# EAGLE board memoryboard3 (EAGLE 7.3.0)
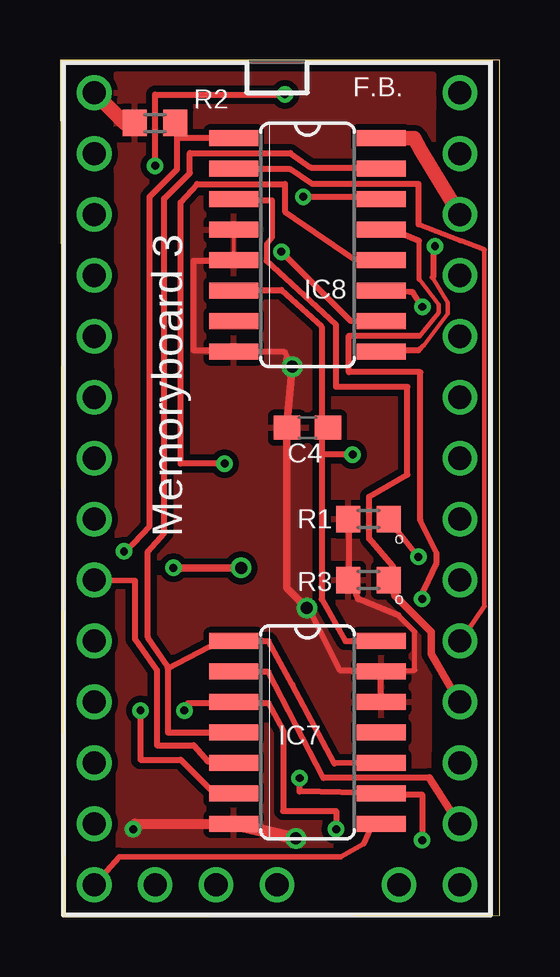
[diagram p0: board, top side]
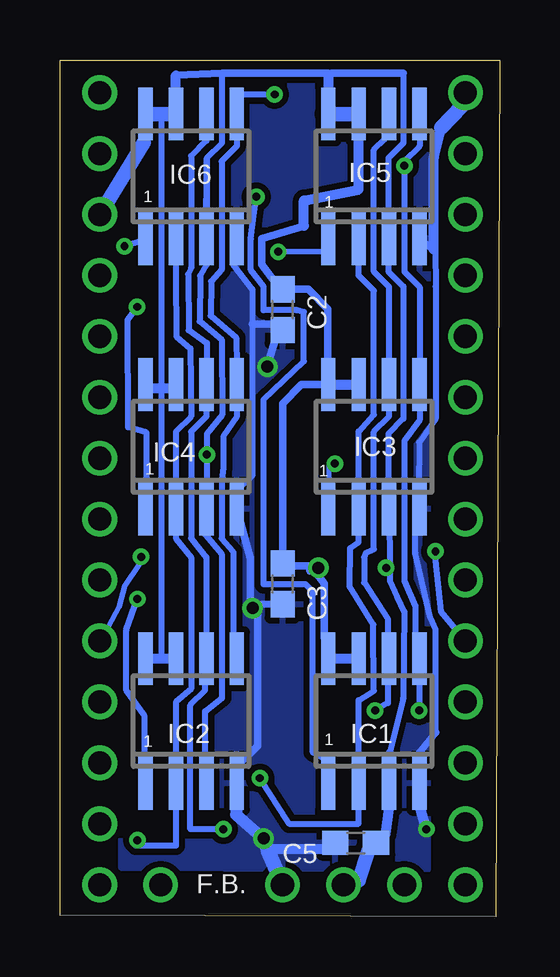
[diagram p1: board, bottom side, seen from below]

Size 18.31 x 35.73 mm. Coordinates in mm from the lower left corner, seen from the top.
Outline: 0.15,0 18.31,0.08 18.31,35.73 0,35.73 0.15,0
Copper layers (1*16): Top 0.0356mm / dielectric 1.5011mm / Bottom 0.0356mm
Design rules "LaenPCBOrder *": minimum track width 6mil, minimum drill 13mil, track to track 6mil, track to pad 6mil, pad to pad 6mil, via to via 6mil, smd to smd 6mil, copper to edge 15mil, drill to drill 6mil, minimum pad ring 7mil, minimum via ring 7mil, stop-mask expansion 3mil, vias tented up to drill 20mil, thermal gap 10mil

## Footprints (pad centres in the part's own frame; a part is rotated, then mirrored left to right if it is on the bottom)
C0603 = smd 1.1 x 1: 1 -0.85,0; 2 0.85,0
SO-08 = smd 0.6 x 2.2: 1 -1.905,-2.6; 2 -0.635,-2.6; 3 0.635,-2.6; 4 1.905,-2.6; 5 1.905,2.6; 6 0.635,2.6; 7 -0.635,2.6; 8 -1.905,2.6
SO14 = smd 0.66 x 2.032: 1 -3.81,-3.073; 2 -2.54,-3.073; 3 -1.27,-3.073; 4 0,-3.073; 5 1.27,-3.073; 6 2.54,-3.073; 7 3.81,-3.073; 8 3.81,3.073; 9 2.54,3.073; 10 1.27,3.073; 11 0,3.073; 12 -1.27,3.073; 13 -2.54,3.073; 14 -3.81,3.073
SO16 = smd 0.66 x 2.032: 1 -4.445,-3.073; 2 -3.175,-3.073; 3 -1.905,-3.073; 4 -0.635,-3.073; 5 0.635,-3.073; 6 1.905,-3.073; 7 3.175,-3.073; 8 4.445,-3.073; 9 4.445,3.073; 10 3.175,3.073; 11 1.905,3.073; 12 0.635,3.073; 13 -0.635,3.073; 14 -1.905,3.073; 15 -3.175,3.073; 16 -4.445,3.073
R0603 = smd 1 x 1.1: 1 -0.85,0; 2 0.85,0
TEENSY_3.0_BASIC-PGM = drill 0.965: 0 -7.62,13.97; 1 -7.62,11.43; 2 -7.62,8.89; 3 -7.62,6.35; 3.3V 7.62,11.43; 3.3V1 -2.54,-16.51; 4 -7.62,3.81; 5 -7.62,1.27; 6 -7.62,-1.27; 7 -7.62,-3.81; 8 -7.62,-6.35; 9 -7.62,-8.89; 10 -7.62,-11.43; 11 -7.62,-13.97; 12 -7.62,-16.51; 13 7.62,-16.51; 14/A0 7.62,-13.97; 15/A1 7.62,-11.43; 16/A2 7.62,-8.89; 17/A3 7.62,-6.35; 18/A4 7.62,-3.81; 19/A5 7.62,-1.27; 20/A6 7.62,1.27; 21/A7 7.62,3.81; 22/A8 7.62,6.35; 23/A9 7.62,8.89; AGND 7.62,13.97; GND -7.62,16.51; GND1 0,-16.51; RESET 5.08,-16.51; VBAT -5.08,-16.51; VIN 7.62,16.51

## Placement (x,y rotation side)
C2  10nF  [C0603]  9.04,25.32 270 bottom
C3  10nF  [C0603]  9.04,13.89 270 bottom
C4  10nF  [C0603]  10.31,20.4 180 top
C5  10nF  [C0603]  5.99,3.09 180 bottom
IC1  SPI Memory  [SO-08]  5.23,8.17 0 bottom
IC2  SPI Memory  [SO-08]  12.85,8.17 0 bottom
IC3  SPI Memory  [SO-08]  5.23,19.6 0 bottom
IC4  SPI Memory  [SO-08]  12.85,19.6 0 bottom
IC5  SPI Memory  [SO-08]  5.23,30.87 0 bottom
IC6  SPI Memory  [SO-08]  12.85,30.87 0 bottom
IC7  74LCX126  [SO14]  10.31,7.7 270 top
IC8  74LCX138  [SO16]  10.31,28.02 270 top
R1  10k  [R0603]  12.85,16.59 180 top
R2  10k  [R0603]  3.96,33.1 180 top
R3  10k  [R0603]  12.85,14.05 180 top
T3.1  TEENSY_3.0_BASIC-PGM  [TEENSY_3.0_BASIC-PGM]  9.04,17.86 0 top

## Library data of the parts
C2-C5 R1-R3 = resistor
IC1-IC6 = microchip; MF: MICROCHIP; MPN: 25C080/SN; OC_FARNELL: unknown; OC_NEWARK: 96K4086
IC7 IC8 = 74xx-eu
T3.1 = Teensy3.0

## Nets
AGND: T3.1.AGND
CS0: IC8.1 R2.1 T3.1.8
GND: C2.2 C3.2 C4.2 C5.2 IC1.4 IC2.4 IC3.4 IC4.4 IC5.4 IC6.4 IC7.7 IC7.12 IC7.13 IC8.4 IC8.5 IC8.8 R1.2 R2.2 R3.2 T3.1.GND T3.1.GND1
N$6: IC8.3 R3.1 T3.1.16/A2
N$9: IC5.1 IC8.10
N$11: IC8.2 R1.1 T3.1.17/A3
N$12: IC6.1 IC8.9
N$13: IC3.1 IC8.12
N$15: IC4.1 IC8.11
N$29: IC1.1 IC8.14
N$30: IC2.1 IC8.13
SCK: IC1.6 IC2.6 IC3.6 IC4.6 IC5.6 IC6.6 IC7.3
SCK_T: IC7.2 T3.1.14/A0
SI: IC1.5 IC2.5 IC3.5 IC4.5 IC5.5 IC6.5 IC7.6
SI_T: IC7.5 T3.1.7
SO: IC1.2 IC2.2 IC3.2 IC4.2 IC5.2 IC6.2 IC7.9
SO_T: IC7.8 T3.1.12
SPI_ENABLE: IC7.1 IC7.4 IC7.10 IC8.15
VBAT: T3.1.VBAT
VCC: C2.1 C3.1 C4.1 C5.1 IC1.3 IC1.7 IC1.8 IC2.3 IC2.7 IC2.8 IC3.3 IC3.7 IC3.8 IC4.3 IC4.7 IC4.8 IC5.3 IC5.7 IC5.8 IC6.3 IC6.7 IC6.8 IC7.14 IC8.6 IC8.16 T3.1.3.3V T3.1.3.3V1
VIN: T3.1.VIN

## Tracks (layer width: path | path; a pad name or v marks a point on that pad's centre or on a via)
CS0  (via drill 0.33 pad 0.25)
  Top 0.152: 4.88,33.07 R2.1 4.88,32.99 | 1.37,11.51 T3.1.8
  Top 0.203: 4.95,32.46 4.88,33.07 | 2.74,15.24 v2.67,15.24
  Top 0.254: IC8.1 4.95,32.46 | 4.88,32.99 4.88,31.17 3.73,30.02 3.73,16.31 2.74,15.24
  Bottom 0.203: 2.67,15.01 v2.67,15.24
  Bottom 0.254: T3.1.8 2.44,12.73 2.67,14.86 2.67,15.01
GND  (via drill 0.33 pad 0.25, 0.5)
  Top 0.152: 12.04,14.1 R3.2 12.12,14.1 12.27,14.1 12.34,13.64 12.27,13.72 | 12.04,16.54 R1.2 | 13.87,10.29 13.41,10.29 IC7.13 13.34,10.29 | IC8.4 IC8.5 7.24,27.36 6.78,27.36 | 9.45,20.42 C4.2 9.45,20.5 | 6.78,23.62 7.24,23.62 IC8.8
  Top 0.203: 14.1,12.57 14.78,11.89 14.78,10.29 13.87,10.29
  Top 0.254: 12.04,16.54 12.04,14.1 | 14.1,12.57 12.42,13.26 12.27,13.72 | 9.45,20.5 9.45,20.42 | v9.68,22.94 9.37,23.55 IC8.8 | 6.78,27.36 5.56,27.36 5.56,23.62 6.78,23.62 | 13.34,10.29 11.66,10.29 10.4,12.76 v10.29,12.88 | 13.34,10.21 IC7.13 13.34,8.99 IC7.12
  Top 0.305: 9.45,23.24 v9.68,22.94 9.45,20.5 | v10.29,12.88 9.45,13.72 9.45,20.42 | v3.05,3.66 3.12,3.89
  Top 0.406: 2.69,33.1 R2.2 | 3.12,3.89 IC7.7
  Top 0.508: IC7.7 v9.83,3.28
  Top 0.61: T3.1.GND 2.69,33.1
  Bottom 0.152: 3.51,16.18 3.28,16.08 3.28,16.38 3.12,16.54 IC3.4 | 10.77,6.44 10.82,6.4 10.82,5.64 IC2.4 | IC4.4 10.9,17.07 10.9,17.83 10.82,17.91 10.77,17.94
  Bottom 0.203: 3.3,16.59 IC3.4 3.37,17.86 | 3.51,16.18 3.37,16.05 | 10.38,13.06 10.07,12.95 | IC6.4 11.08,27.16 | C2.2 9.2,24.71
  Bottom 0.254: 3.37,17.86 3.35,19.79 2.67,20.78 2.67,26.28 2.67,27.76 IC5.4 3.28,28.17 | 2.67,7.7 2.67,11.96 2.9,12.5 3.51,15.18 3.51,16.18 | 11.08,27.16 10.3,26.16 10.3,24.71 10.3,18.41 10.77,17.94 | v10.29,12.88 10.07,12.95 | IC1.4 3.28,5.56 3.28,4.5 | C2.2 9.37,24 | 9.79,3.19 v9.83,3.28
  Bottom 0.305: 3.28,28.17 2.74,27.84 | 1.58,33.8 T3.1.GND | IC1.4 3.35,6.84 2.67,7.7 | 9.75,3.2 9.79,3.19 | IC4.4 10.38,14.97 10.38,13.06 C3.2 | 10.07,12.95 10.07,7.14 10.77,6.44 | 9.2,24.71 10.3,24.71 | C5.2 6.63,2.82 | 9.37,24 v9.68,22.94
  Bottom 0.406: 2.74,27.84 2.74,31.66 2.43,32.9 | v3.05,3.66 3.28,4.5 | 6.63,2.82 9.68,2.82 T3.1.GND1
  Bottom 0.508: IC2.4 10.97,4.27 9.75,3.2
  Bottom 0.61: 2.43,32.9 1.58,33.8 | 9.79,3.19 9.67,2.78 T3.1.GND1
  pour Bottom (isolate 0.254): 2.97,34.98 15.54,34.98 15.77,2.06 2.97,1.98
  pour Top (isolate 0.254): 2.36,35.13 15.54,35.13 15.32,2.44 2.44,2.44
N$6
  Top 0.152: 13.72,14.02 R3.1 13.87,14.1 | 16.61,8.99 T3.1.16/A2 | 7.24,29.87 IC8.3
  Top 0.203: 8.61,27.36 8.61,28.04
  Top 0.229: 8.61,28.04 8.84,28.35
  Top 0.254: 13.94,13.41 13.72,14.02 | 8.61,27.36 11.51,24.69 11.51,22.1 14.48,22.1 14.48,18.44 12.88,17.53 12.88,15.77 13.87,14.63 13.87,14.1 | 8.84,28.35 8.84,29.87 7.24,29.87
  Top 0.305: 13.94,13.41 15.47,11.89 15.47,10.97 16.61,8.99
N$9  (via drill 0.33 pad 0.25)
  Top 0.229: v9.22,27.74 12.12,24.84 IC8.10
  Bottom 0.203: 7.16,27.58 7.16,27.74 7.16,28.27 IC5.1
  Bottom 0.229: 7.16,27.74 v9.22,27.74
N$11  (via drill 0.33)
  Top 0.152: 13.72,16.54 R1.1 | 7.24,31.17 IC8.2 | 16.69,11.51 T3.1.17/A3
  Top 0.178: 17.68,12.95 17.68,27.81
  Top 0.203: 14.94,28.88 16.69,28.19 17.68,27.81 | 16.69,11.51 17.68,12.95
  Top 0.229: v14.94,15.01 13.72,16.54
  Top 0.254: 7.24,31.17 9.6,31.17 10.52,30.56 14.94,30.56 14.94,28.88
  Bottom 0.152: 16.61,11.51 T3.1.17/A3
  Bottom 0.203: 15.01,14.71 v14.94,15.01
  Bottom 0.229: 16.61,11.51 15.85,12.95 15.62,13.79 15.01,14.71
N$12  (via drill 0.33)
  Top 0.152: 15.16,23.82 15.14,23.82 | 13.41,23.62 IC8.9
  Top 0.178: v15.63,27.97 15.55,27.97 | 15.5,26.67 16.15,25.6 16.15,25.15 15.16,23.82 | 15.14,23.82 15.02,23.69
  Top 0.203: 15.02,23.69 14.94,23.62 | 15.54,26.67 15.5,26.67
  Top 0.254: 14.94,23.62 13.41,23.62 | 15.55,27.97 15.54,26.67
  Bottom 0.152: 14.86,28.19 14.78,28.27 IC6.1
  Bottom 0.254: 14.86,28.19 v15.63,27.97
N$13  (via drill 0.33)
  Top 0.152: 13.34,27.43 IC8.12
  Top 0.254: 13.34,27.43 12.27,27.43 9.37,29.41 9.37,30.56 5.72,30.56 5.03,29.79 5.03,18.9 v6.86,18.9
  Bottom 0.152: 7.09,17.07 IC3.1
  Bottom 0.203: v6.86,18.9 7.09,18.9 7.09,17.07
N$15  (via drill 0.33)
  Top 0.152: 12.88,26.06 13.34,26.06 IC8.11
  Top 0.254: v15.1,25.44 14.71,26.05 14.55,26.06 IC8.11
  Bottom 0.152: 14.71,17.07 IC4.1
  Bottom 0.254: v15.1,25.44 15.5,24.9 15.47,20.42 14.71,20.19 14.71,17.07
N$29  (via drill 0.33)
  Top 0.152: 14.17,30.02 IC8.14
  Top 0.254: v10.13,30.02 14.17,30.02
  Bottom 0.152: 7.24,6.55 IC1.1
  Bottom 0.254: v10.13,30.02 10.36,28.27 10.36,26.98 9.83,26.29 9.83,25.3 8.46,25.3 8.15,25.22 8.15,23.17 9.83,21.56 9.83,13.87 8.08,13.87 7.77,13.56 7.77,6.86 7.24,6.55
N$30  (via drill 0.33)
  Top 0.152: 13.79,28.65 IC8.13
  Top 0.178: 14.94,24.23 14.98,24.2 15.77,25.19 15.77,25.53 14.96,26.59
  Top 0.203: 14.27,24.24 14.94,24.23 | 14.96,26.59 14.96,28.18
  Top 0.254: 14.96,28.18 13.79,28.65 | 14.94,24.23 12.04,24.23 12.04,22.71 15.01,22.71 15.01,16.54 15.7,15.16 15.7,14.78 15.16,13.64 v15.09,13.26
  Bottom 0.152: 14.78,5.64 IC2.1
  Bottom 0.254: v15.09,13.26 15.54,11.96 15.54,9.45 14.78,8.38 14.78,5.64
SCK  (via drill 0.33)
  Top 0.152: 8.23,8.92 7.24,8.92 IC7.3
  Top 0.254: 7.24,8.92 5.33,8.92 v5.18,8.61 | v11.51,3.66 11.51,4.42 9.3,4.42 9.3,7.77 8.69,8.92 8.23,8.92
  Bottom 0.152: 12.22,22.94 12.27,22.86 12.27,22.25 IC4.6 | 4.65,10.74 IC1.6 | 4.6,21.03 4.65,21.11 4.65,22.17 IC3.6 | 12.27,10.74 IC2.6
  Bottom 0.203: IC6.6 12.22,32.36 | IC1.6 4.65,10.77 4.65,11.81 | 4.79,32.43 IC5.6
  Bottom 0.254: 12.22,32.36 12.85,31.72 12.85,27.05 12.98,26.8 12.95,24.46 12.19,23.93 12.19,23.17 12.22,22.94 | IC4.6 12.22,20.87 12.85,20.23 12.85,15.79 12.22,14.99 IC2.6 | IC3.6 4.6,26.26 5.23,26.9 5.23,31.98 4.79,32.43 | 4.6,21.03 4.6,20.86 5.23,20.23 5.23,15.33 5.59,15.15 5.64,14.99 5.64,13.94 4.65,12.42 4.65,11.81 | v5.18,8.61 4.65,8.92 4.65,10.74 | 12.27,10.74 12.27,9.45 12.88,8.84 12.88,3.66 v11.51,3.66
SCK_T
  Top 0.152: 8.23,10.21 7.24,10.21 IC7.2 | 16.61,3.89 T3.1.14/A0
  Top 0.254: 8.23,10.21 8.69,10.21 10.97,5.79 15.39,5.79
  Top 0.305: 16.61,3.89 15.39,5.79
SI  (via drill 0.33)
  Top 0.152: 7.24,5.18 IC7.6
  Top 0.254: 7.24,5.18 6.25,5.33 5.03,6.55 3.35,6.55 v3.35,8.61 | v9.37,34.29 3.96,34.29 v3.96,31.32
  Bottom 0.152: IC2.5 10.97,10.82 10.97,11.51 11.05,11.58 11.1,11.66 | IC4.5 10.97,22.25 10.97,22.86 10.95,22.94 | 3.33,22.94 3.35,22.86 3.35,22.25 IC3.5 | 3.35,10.74 IC1.5 3.35,10.82 3.35,11.43 3.4,11.05 | 10.97,34.29 IC6.5
  Bottom 0.203: 3.96,31.51 v3.96,31.32
  Bottom 0.254: IC6.5 10.95,32.14 11.58,31.51 11.58,26.98 12.01,26.5 12.04,25.07 10.97,24.16 10.95,22.94 | IC4.5 10.95,20.87 11.51,20.04 11.51,18.75 11.58,18.21 11.58,15.79 11.1,15.23 11.1,11.66 | IC5.5 3.33,32.14 3.96,31.51 | v3.96,31.32 3.96,26.9 3.33,26.27 3.33,22.94 | IC3.5 3.33,20.72 3.96,19.85 3.96,14 3.51,12.95 3.51,11.74 | 3.51,11.13 3.51,11.74 | 3.51,11.74 3.4,11.05 | 3.35,10.74 v3.35,8.61 | v9.37,34.29 10.97,34.29
SI_T
  Top 0.152: 6.17,6.48 7.24,6.48 IC7.5
  Top 0.254: 6.17,6.48 5.56,7.16 4.04,7.16 4.04,10.29 3.12,11.58 3.12,14.02 T3.1.7
SO  (via drill 0.33)
  Top 0.152: 13.87,5.11 13.41,5.11 IC7.9
  Top 0.254: IC7.9 9.98,5.23 v9.98,5.79 | 13.87,5.11 15.09,5.11 v15.09,3.2
  Bottom 0.152: 5.87,27.38 IC5.2 | 5.87,15.95 IC3.2 | 13.49,6.11 IC2.2 | 13.49,17.86 IC4.2 | 5.87,5.11 IC1.2
  Bottom 0.254: IC6.2 13.49,26.74 13.46,24.2 12.88,23.7 12.85,20.87 13.49,20.23 13.49,17.86 | IC4.2 13.49,15.78 12.85,14.99 12.85,9.51 13.49,8.96 13.49,6.11 | IC3.2 5.87,20.24 5.23,20.95 5.23,26.1 5.87,26.74 5.87,27.38 | IC1.2 5.87,9.04 5.23,9.44 5.26,12.19 6.25,13.77 6.22,15.37 5.87,15.63 5.87,15.95 | 5.87,5.11 5.87,3.89 8.76,3.89 v9.98,5.79 | IC2.2 13.49,2.97 15.16,2.97 v15.09,3.2
SO_T
  Top 0.229: 2.47,2.5 8.15,2.51 10.59,2.51 11.69,2.5 12.65,3.05 13.03,3.89 IC7.8
  Top 0.254: T3.1.12 2.47,2.5
SPI_ENABLE
  Top 0.152: 13.41,6.48 IC7.10 | 13.34,31.24 IC8.15
  Top 0.203: 6.25,11.28 IC7.1
  Top 0.254: IC7.4 4.5,7.7 4.5,10.36 | IC7.1 8.69,11.51 9.68,9.68 11.43,6.4 IC7.10 | 13.34,31.24 10.45,31.24 9.6,31.85 5.41,31.85 5.41,31.01 4.34,29.95 4.34,16 3.66,15.24 3.66,11.66 4.5,10.44 4.5,10.36 | 4.5,10.36 6.25,11.28
VCC  (via drill 0.33, 0.5)
  Top 0.152: 10.9,20.5 C4.1 | 7.09,26.14 IC8.6
  Top 0.254: 10.9,20.5 10.9,24.61 9.22,26.14 7.09,26.14 | IC7.14 11.89,11.51 10.9,13.26 10.9,19.28 | 10.9,20.27 10.9,19.28 | v12.19,19.28 10.9,19.28
  Top 0.305: 10.9,20.27 C4.1 | v4.72,14.55 v7.54,14.55
  Top 0.61: IC8.16 14.76,32.46 15.06,31.93 T3.1.3.3V
  Bottom 0.152: 14.1,21.95 13.51,22.04 | IC1.8 7.16,10.97 7.16,11.58 7.31,11.64 | C5.1 5.03,3.05 5.11,3.12 5.13,3.09 | 4.6,4.52 4.65,4.65 4.65,5.56 IC1.3 4.57,5.64 4.57,6.25 4.48,6.28 | IC3.3 4.65,17.07 4.65,17.75 4.63,17.78 | 7.14,35.13 7.16,35.13 7.01,35.18 | 14.76,32.78 14.78,32.92 14.78,33.3 IC6.8 | 14.08,21.96 14.78,22.1 IC4.8 | 16.61,29.11 T3.1.3.3V | IC4.3 12.27,17.07 12.19,16.84
  Bottom 0.203: IC5.3 4.63,27.86 | 12.35,16.05 IC4.3
  Bottom 0.254: 4.57,6.86 4.02,9.11 4,9.28 3.96,12.73 4.27,13.35 4.57,14.03 4.57,14.4 IC3.3 | 4.57,6.28 4.48,6.28 | 4,35.18 4,32.27 4.63,31.64 4.63,27.86 4.63,26.91 4,26.28 4,20.77 4.63,20.14 4.63,17.78 | IC2.3 12.27,6.71 12.27,8.58 11.56,9.12 11.56,15.1 12.35,16.05 | IC6.3 12.19,31.64 | 12.19,31.64 12.19,27.21 12.48,26.74 12.5,24.84 11.58,24.08 11.56,20.93 12.19,20.14 12.19,19.58 v12.19,19.28 12.19,16.84 | 12.19,31.64 11.56,32.27 11.56,35.17 | 14.1,21.95 14.1,10.77 | 14.08,21.96 14.08,22.27 14.08,33.47 | v7.54,14.55 7.92,14.4 7.92,14.63
  Bottom 0.305: 13.49,35.09 11.56,35.17 7.14,35.17 7.14,35.13 | 5.47,2.74 5.13,3.09 | C5.1 4.75,3.47 | 7.31,11.64 7.31,13.91 7.87,14.63 7.92,14.63 8.94,14.63 C3.1 9.04,21.4 8.26,22.19 IC3.8 7.15,22.22 7.15,25.34 7.98,26.17 C2.1 8.89,26.32 9.45,26.59 9.91,27.2 9.91,28.27 8.15,28.8 | 4.57,6.86 4.57,6.28 | 7.01,35.18 4,35.18
  Bottom 0.406: 14.83,32.28 14.76,32.78 | IC6.7 13.49,35.09 | 7.14,35.13 IC5.8 | IC4.8 14.76,21.98 14.7,22.04 13.51,22.04 IC4.7 | IC3.8 IC3.7 | IC2.8 14.1,10.77 IC2.7 | IC1.8 IC1.7 | 4.75,3.47 4.6,4.52 | 8.15,28.8 8.15,29.87 5.87,30.33 IC5.7
  Bottom 0.61: T3.1.3.3V 14.83,32.28 | IC6.8 14.08,33.47 IC6.7 | IC5.8 IC5.7 | T3.1.3.3V1 5.87,1.52 5.47,2.74

## Text on the board
tPlace: F.B. | Memoryboard 3 | o | o
bPlace: 1 | 1 | 1 | 1 | 1 | 1 | F.B.